# Altium PCB PWM-SWITCH.PcbDoc
Units mil, origin at the board's own origin, x right, y up, seen from the top; angles counter-clockwise.
Board outline 425 x 360 mil, 2 copper layers (Top Layer, Bottom Layer); 6 components, 0 nets, 22 pads, 7 vias.
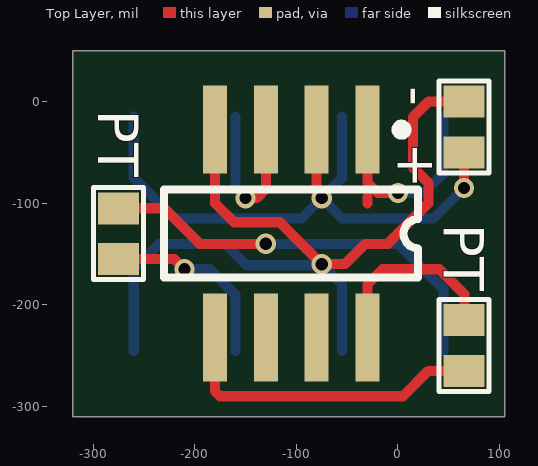
[diagram p0: Top Layer view]
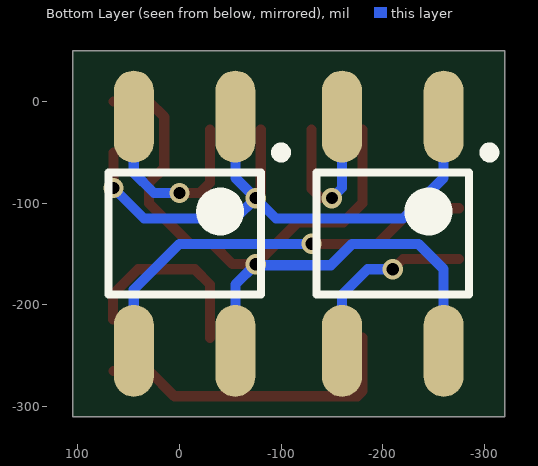
[diagram p1: Bottom Layer view, seen from below]

## Layer stack, top to bottom
Top Layer: signal copper 1.4
Dielectric: dielectric 12.6, FR-4, Dk 4.8
Bottom Layer: signal copper 1.4

## Board outline
-320,-310 105,-310 105,50 -320,50

## Design rules (kind name [scope] priority, off if disabled: settings)
Clearance [All] p1: gap=10
HoleSize [All] p1: absolutevalues=TRUE maxlimit=20 minlimit=12 maxpercent=80.000 minpercent=20.000
PolygonConnect [All] p1: connectstyle=Relief reliefconductorwidth=10 reliefentries=4 polygonreliefangle="90 Angle" airgapwidth=10
RoutingVias [All] p1: holewidth=12 width=20 viastyle="Through Hole" minholewidth=12 minwidth=20 maxholewidth=12 maxwidth=20
SilkscreenOverComponentPads [All] p1: minsilkscreentomaskgap=10
SolderMaskExpansion [All] p1: expansion=4
Width [All] p1: maxlimit=10 minlimit=10 preferedwidth=10
26 further rules are at their usual default settings.

## Components (designator, comment, footprint, x,y, rotation, side; value= is the part's Value field where it differs from the comment)
? "Comment" SOP8 -105,-130 r180 top
? "Comment" SOP-4 -210,-130 r270 bottom
? "Comment" SOP-4 -5,-130 r270 bottom
? "Comment" "TOUCH JMP 2PAD" -275,-130 r0 top
? "Comment" "TOUCH JMP 2PAD" 65,-25 r0 top
? "Comment" "TOUCH JMP 2PAD" 65,-240 r0 top

## Footprints (in the part's own frame and the unit in brackets; to place one, negate y for a bottom-side part, rotate by r counter-clockwise, add the part's x,y. Pads: shape width x height; smd on the part's side, far side on the other; paste and mask are expansions set on the pad)
SOP8 [mm] "Small Outline; 8 Leads; Body Width 4.3 mm; Pitch 1.27 mm"
  rect 0.6x2.2 smd: 1(-1.905,-2.6) 2(-0.635,-2.6) 3(0.635,-2.6) 4(1.905,-2.6) 5(1.905,2.6) 6(0.635,2.6) 7(-0.635,2.6) 8(-1.905,2.6)
  silkscreen extent -3.17,-2.72 3.17,1.1
SOP-4 [mm] "SOP, 4-Leads, Body 2.7x4.5mm (max), Pitch 1.27mm, IPC Medium Density"
  oval 2.3x1 smd: 1(-2.927,1.27) 2(-2.927,-1.27) 3(2.927,-1.27) 4(2.927,1.27)
  silkscreen extent -2.15,-1.91 1.52,2.54, body extent -3.5,-2.45 3.5,2.45, height 2.9
"TOUCH JMP 2PAD" [mil] "Touch Jumper 2 Pad"
  rect 40x31.5 smd mask+0: 1(0,25) 2(0,-25)
  silkscreen extent -25,-45 25,45

## Via types
v1: diameter 20, hole 12, Top Layer to Bottom Layer, tented both sides, 7 vias

## Nets (pads, with @x,y where several pads share a name; then routed paths per layer and width w, separated by ;. In a path a pad name is that pad's centre, name@x,y a point inside that pad or via, vN(x,y) a via of type N, cw(c..) or ccw(c..) an arc to the next point about the centre after c; other vN are vias at no path point)
pads on no net: ?.1 ?.2 ?.3 ?.4 ?.5 ?.6 ?.7 ?.8
copper on no net: | length 2946.2
  Top Layer w10: -275,-155 -220,-155 v1(-210,-165) ; -275,-105 -230,-105 -195,-140 v1(-130,-140) ; -180,-232.36 -180,-285 -175,-290 5,-290 30,-265 65,-265 ; -180,-27.64 -180,-100 -161.25,-118.75 -116.25,-118.75 v1(-75,-160) -52.19,-160 -32.19,-140 -10,-140 30,-100 30,-80 15,-65 15,-15 30,0 65,0 ; v1(-150,-95) -139.05,-95 -130,-85.95 -130,-27.64 ; -80,-27.64 -80,-89.96 v1(-74.96,-95) ; -30,-232.36 -30,-180 -15,-165 40.75,-165 65.37,-189.63 65.37,-214.63 ; -30,-100 -30,-94.05 ; -30,-27.64 -30,-80 -20,-90 v1(0,-90) ; v1(65,-85) 65,-50
  Bottom Layer w10: -260,-245.24 -260,-165 -235,-140 -170,-140 -149,-161 -76,-161 v1(-75,-160) -55,-180 -55,-190 -55,-245.24 ; -260,-14.76 -260,-75 -220,-115 -94.96,-115 -55,-75.04 -55,-14.76 ; v1(-210,-165) -185,-165 -160,-190 -160,-245.24 ; -160,-14.76 -160,-85 v1(-150,-95) ; v1(-130,-140) 0,-140 25,-165 45,-185 45,-245.24 ; v1(-74.96,-95) -54.96,-115 35,-115 v1(65,-85) ; v1(0,-90) 25,-90 45,-70 45,-14.76

## Silkscreen, mask and mechanical layers (free items; w line width, h text height)
Top Overlay:
  text "-" at 0,15 h40 r270
  text "PT" at -295,-8 h40 r270
  text "+" at 0,-40 h40 r270
  text "PT" at 45,-120 h40 r270
Mechanical 1:
  the board outline again, w10